# EAGLE board timer_controller_V2 (EAGLE 9.6.2)
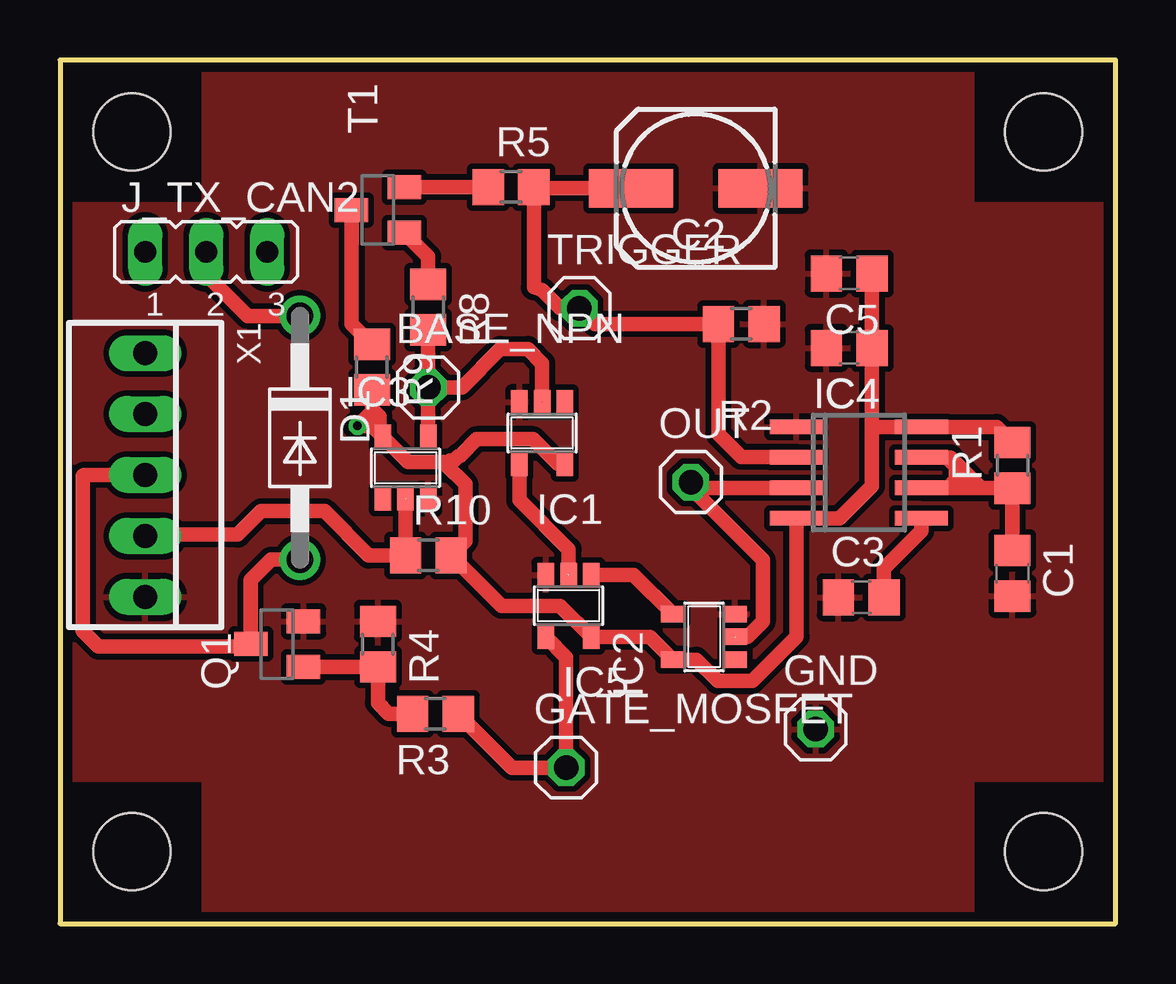
[diagram p0: board, top side]
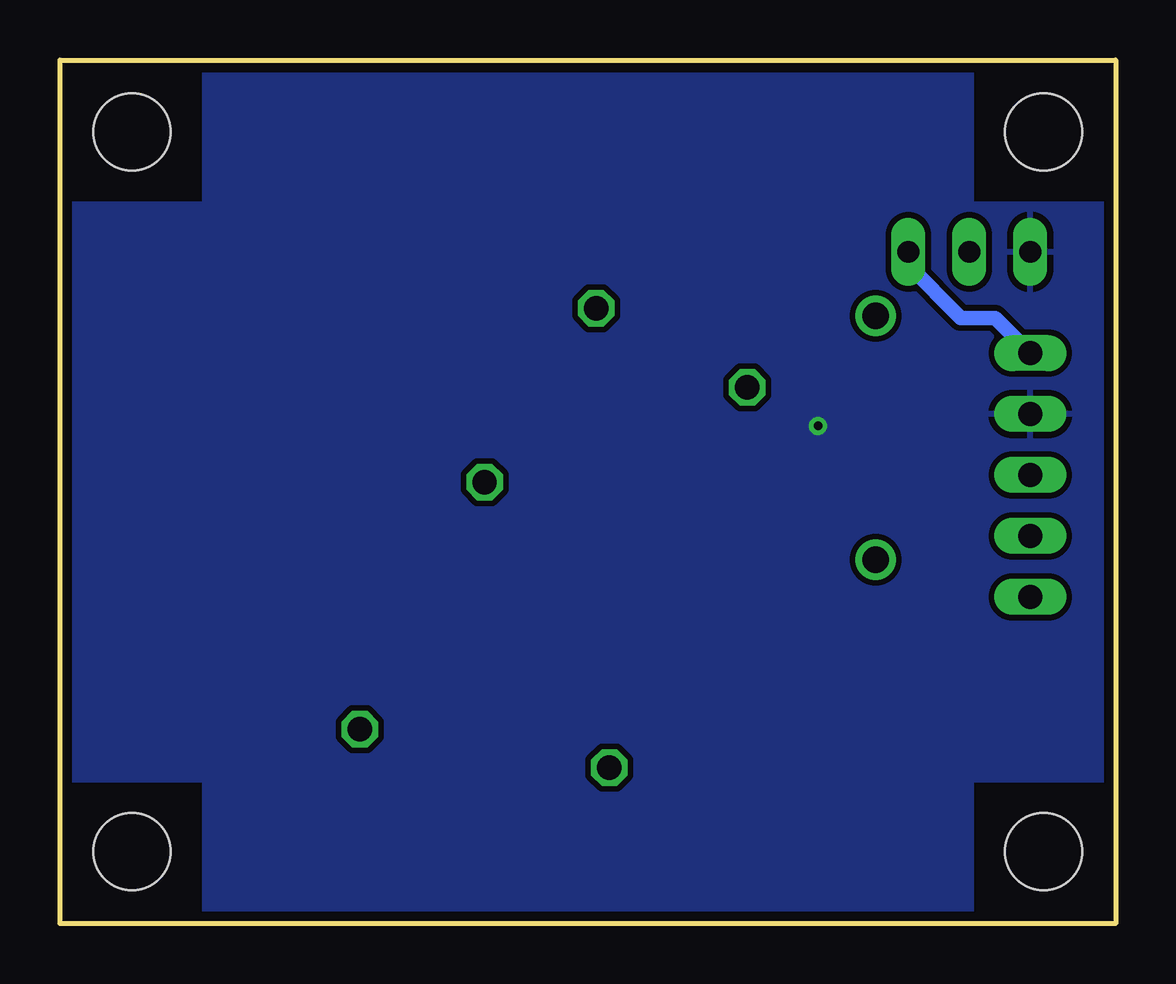
[diagram p1: board, bottom side, seen from below]

Size 44 x 36 mm. Coordinates in mm from the lower left corner, seen from the top.
Outline: 0,0 44,0 44,36 0,36 0,0
Copper layers (1*16): Top 0.035mm / dielectric 0.11mm / Bottom 0.035mm
Design rules "MCS-standard *": minimum track width 0.24mm, minimum drill 0.3mm, track to track 0.24mm, track to pad 0.24mm, pad to pad 0.24mm, via to via 0.24mm, smd to smd 0.24mm, copper to edge 0.4mm, drill to drill 0.3mm, minimum pad ring 10mil, minimum via ring 0.2mm, stop-mask expansion 0.05mm, vias tented up to drill 0.4mm, thermal gap 10mil
Net classes: 0 default: width 0.61 mm
Holes 3.2 mm at 3,33 3,3 41,3 41,33
tKeepout: area 38.2,30.2 to 43.8,35.8; area 0.2,30.2 to 5.8,35.8; area 0.2,0.2 to 5.8,5.8; area 38.2,0.2 to 43.8,5.8

## Footprints (pad centres in the part's own frame; a part is rotated, then mirrored left to right if it is on the bottom)
1X01 = drill 1.016 octagon: 1 0,0
C0805 = smd 1.3 x 1.5: 1 -0.95,0; 2 0.95,0
153CLV-0605 = smd 3.5 x 1.6: + 2.7,0; - -2.7,0
DO41-10 = drill 1.118: A 5.08,0; C -5.08,0
SOT23-5 = smd 0.69 x 0.99: 1 -0.95,-1.29; 2 0,-1.29; 3 0.95,-1.29; 4 0.95,1.3; 5 -0.95,1.3
SO08 = smd 0.6 x 2.2: 1 -1.905,-2.6; 2 -0.635,-2.6; 3 0.635,-2.6; 4 1.905,-2.6; 5 1.905,2.6; 6 0.635,2.6; 7 -0.635,2.6; 8 -1.905,2.6
JP2 = drill 0.914 long: 1 -2.54,0; 2 0,0; 3 2.54,0
SOT23 = smd 1 x 1.4: 1 -0.95,-1.1; 2 0.95,-1.1; 3 0,1.1
R0805 = smd 1.3 x 1.5: 1 -0.95,0; 2 0.95,0
22-23-2051 = drill 1 long: 1 -5.08,0; 2 -2.54,0; 3 0,0; 4 2.54,0; 5 5.08,0

## Placement (x,y rotation side)
BASE_NPN  BASE_NPN  [1X01]  15.35,22.35 0 top
C1  2.2µF  [C0805]  39.7,14.6 270 top
C2  150µF  [153CLV-0605]  26.5,30.65 180 top
C3  0.01µF  [C0805]  33.4,13.6 0 top
C4  0.1µF  [C0805]  32.9,24 180 top
C5  1µF  [C0805]  32.9,27.1 180 top
D1  1N4007  [DO41-10]  10,20.25 270 top
GATE_MOSFET  GATE_MOSFET  [1X01]  21.1,6.5 0 top
GND  GND  [1X01]  31.5,8.1 0 top
IC1  TC4S584F  [SOT23-5]  20.1,20.45 180 top
IC2  TC4S584F  [SOT23-5]  26.85,11.95 90 top
IC3  TC4S584F  [SOT23-5]  14.4,19 0 top
IC4  LM555D  [SO08]  33.3,18.8 270 top
IC5  Gate OR  [SOT23-5]  21.2,13.25 180 top
J_TX_CAN2  [JP2]  6.1,28 0 top
OUT  OUT  [1X01]  26.3,18.4 0 top
Q1  BSS138  [SOT23]  9.05,11.65 90 top
R1  2.2k  [R0805]  39.7,19.1 90 top
R2  18k  [R0805]  28.4,25 180 top
R3  10k  [R0805]  15.65,8.75 180 top
R4  10k  [R0805]  13.25,11.65 270 top
R5  12k  [R0805]  18.8,30.7 0 top
R8  100  [R0805]  15.35,25.7 270 top
R9  100  [R0805]  13,23.2 270 top
R10  1k  [R0805]  15.35,15.35 0 top
T1  2N2369  [SOT23]  13.25,29.75 90 top
TRIGGER  TRIGGER  [1X01]  21.65,25.65 0 top
X1  22-23-2051  [22-23-2051]  3.55,18.7 270 top

## Library data of the parts
BASE_NPN GATE_MOSFET GND OUT TRIGGER = pinhead
C1-C5 = rcl; SPICEPREFIX: C
D1 = diode
IC1-IC3 IC5 = 74xx-little-us
IC4 = linear
J_TX_CAN2 = jumper
Q1 = transistor-small-signal
R1-R5 R8-R10 = rcl; SPICEPREFIX: R
T1 = transistor-neu-to92
X1 = con-molex; MF: MOLEX; MPN: 22-23-2051; OC_FARNELL: 1462952; OC_NEWARK: 38C9178

## Nets
12_SWITCHES: J_TX_CAN2.3 X1.1
+12V: C4.1 C5.1 IC1.5 IC2.5 IC3.5 IC4.4 IC4.8 IC5.5 J_TX_CAN2.1 R1.2 R9.2 R10.2 X1.2
BASE_NPN: BASE_NPN.1 IC1.2 IC3.4 R8.2
BP_START: IC3.2 R10.1 X1.4
GATE_MOSFET: GATE_MOSFET.1 IC5.4 R3.1
GND: C1.2 C2.- C3.1 C4.2 C5.2 GND.1 IC1.3 IC2.3 IC3.3 IC4.1 IC5.3 Q1.2 R2.1 R4.1 X1.5
N$1: Q1.1 R3.2 R4.2
N$2: R9.1 T1.3
N$3: IC1.4 IC5.2
N$4: IC2.4 IC5.1
N$9: C3.2 IC4.5
N$17: C1.1 IC4.6 IC4.7 R1.1
N$26: R5.1 T1.2
N$27: R8.1 T1.1
OUT: IC2.2 IC4.3 OUT.1
RELAIS_INJECTEUR_12_PROTEGE: D1.C J_TX_CAN2.2
RELAIS_INJECTEUR_MASSE: D1.A Q1.3 X1.3
TRIGGER: C2.+ IC4.2 R2.2 R5.2 TRIGGER.1

## Tracks (layer width: path | path; a pad name or v marks a point on that pad's centre or on a via)
12_SWITCHES
  Bottom 0.61: X1.1 5.02,25.25 6.45,25.25 8.64,27.44 J_TX_CAN2.3
+12V  (via drill 0.35)
  Top 0.61: C5.1 C4.1 33.85,20.6 | 33.85,20.6 33.85,18.25 32.49,16.89 IC4.4 30.7,11.95 28.86,10.11 27.42,10.11 26.53,11 IC2.5 24.6,11.95 IC5.5 20.85,13.25 18.4,13.25 R10.2 16.9,15.95 16.9,18.32 16.1,19.12 16.22,19.25 | 33.85,20.6 33.95,20.7 IC4.8 39.05,20.7 R1.2 | 16.22,19.25 14.5,19.25 IC3.5 | IC1.5 20.76,19.15 19.72,20.19 17.36,20.19 16.67,19.5 16.62,19.5 16.42,19.3 16.27,19.3 16.22,19.25 | IC3.5 13.32,20.43 13.32,21.13 13,21.45 | 13,21.45 R9.2 | IC3.5 13,20.75 v12.4,20.75 13,21.35 13,21.45
  pour Bottom (isolate 0.2): 6,36 38,36 38,30 44,30 44,6 38,6 38,0 6,0 6,6 0,6 0,30 6,30
BASE_NPN
  Top 0.61: IC3.4 BASE_NPN.1 | BASE_NPN.1 R8.2 | BASE_NPN.1 16.75,22.35 18.35,23.95 19.5,23.95 20.1,23.35 IC1.2
BP_START
  Top 0.61: IC3.2 R10.1 12.87,15.34 11.02,17.19 8.39,17.19 7.41,16.21 3.6,16.21 X1.4
GATE_MOSFET
  Top 0.61: R3.1 18.85,6.5 GATE_MOSFET.1 21.1,11.1 IC5.4
GND
  pour Top: 0,30 6,30 6,36 38,36 38,30 44,30 44,6 38,6 38,0 6,0 6,6 0,6
N$1
  Top 0.61: Q1.1 R4.2 13.25,9.2 13.7,8.75 R3.2
N$2
  Top 0.61: T1.3 12.15,25 R9.1
N$3
  Top 0.61: IC5.2 21.2,15.6 19.15,17.65 IC1.4
N$4
  Top 0.61: IC2.4 23.91,14.54 IC5.1
N$9
  Top 0.61: IC4.5 35.9,16.36 34.35,14.81 C3.2
N$17
  Top 0.61: IC4.6 37,18.16 | 37,18.16 37.7,18.16 | 37.7,18.16 38.3,18.16 | 38.3,18.16 39.69,18.16 R1.1 | 36.19,19.43 IC4.7 | IC4.7 37.12,19.43 37.35,19.2 | 37.7,18.16 37.7,18.7 | 37.7,18.7 37.7,18.85 | 37.35,19.2 37.7,18.85 | 37.7,18.85 38.3,18.25 38.3,18.16 | IC4.7 36.97,19.43 37.7,18.7 | 37.35,19.2 37.35,18.52 37,18.16 | R1.1 39.8,18.05 | R1.1 C1.1
N$26
  Top 0.61: R5.1 T1.2
N$27
  Top 0.61: T1.1 15.35,27.8 R8.1
OUT
  Top 0.61: IC4.3 26.54,18.16 OUT.1 26.3,18.15 29.3,15.15 29.3,12.59 28.66,11.95 IC2.2
RELAIS_INJECTEUR_12_PROTEGE
  Top 0.61: J_TX_CAN2.2 6.1,27.05 7.82,25.33 D1.C
RELAIS_INJECTEUR_MASSE
  Top 0.61: D1.A 8.8,15.17 7.95,14.32 Q1.3 7.85,11.55 1.6,11.55 0.95,12.2 0.95,18.65 1,18.7 X1.3
TRIGGER
  Top 0.61: IC4.2 30.68,19.45 28.4,19.45 27.45,20.4 R2.2 22.3,25 TRIGGER.1 20.85,25.65 20.1,26.4 19.75,26.52 R5.2 19.76,30.65 C2.+

## Text on the board
tValues: Timer / INVICTUS v2.0